# Altium PCB atWork_Encoder.PcbDoc
Units mm, origin at the board's own origin, x right, y up, seen from the top; angles counter-clockwise.
Board outline 132.46 x 79.88 mm, 2 copper layers (Top Layer, Bottom Layer); 74 components, 60 nets, 362 pads, 73 vias.
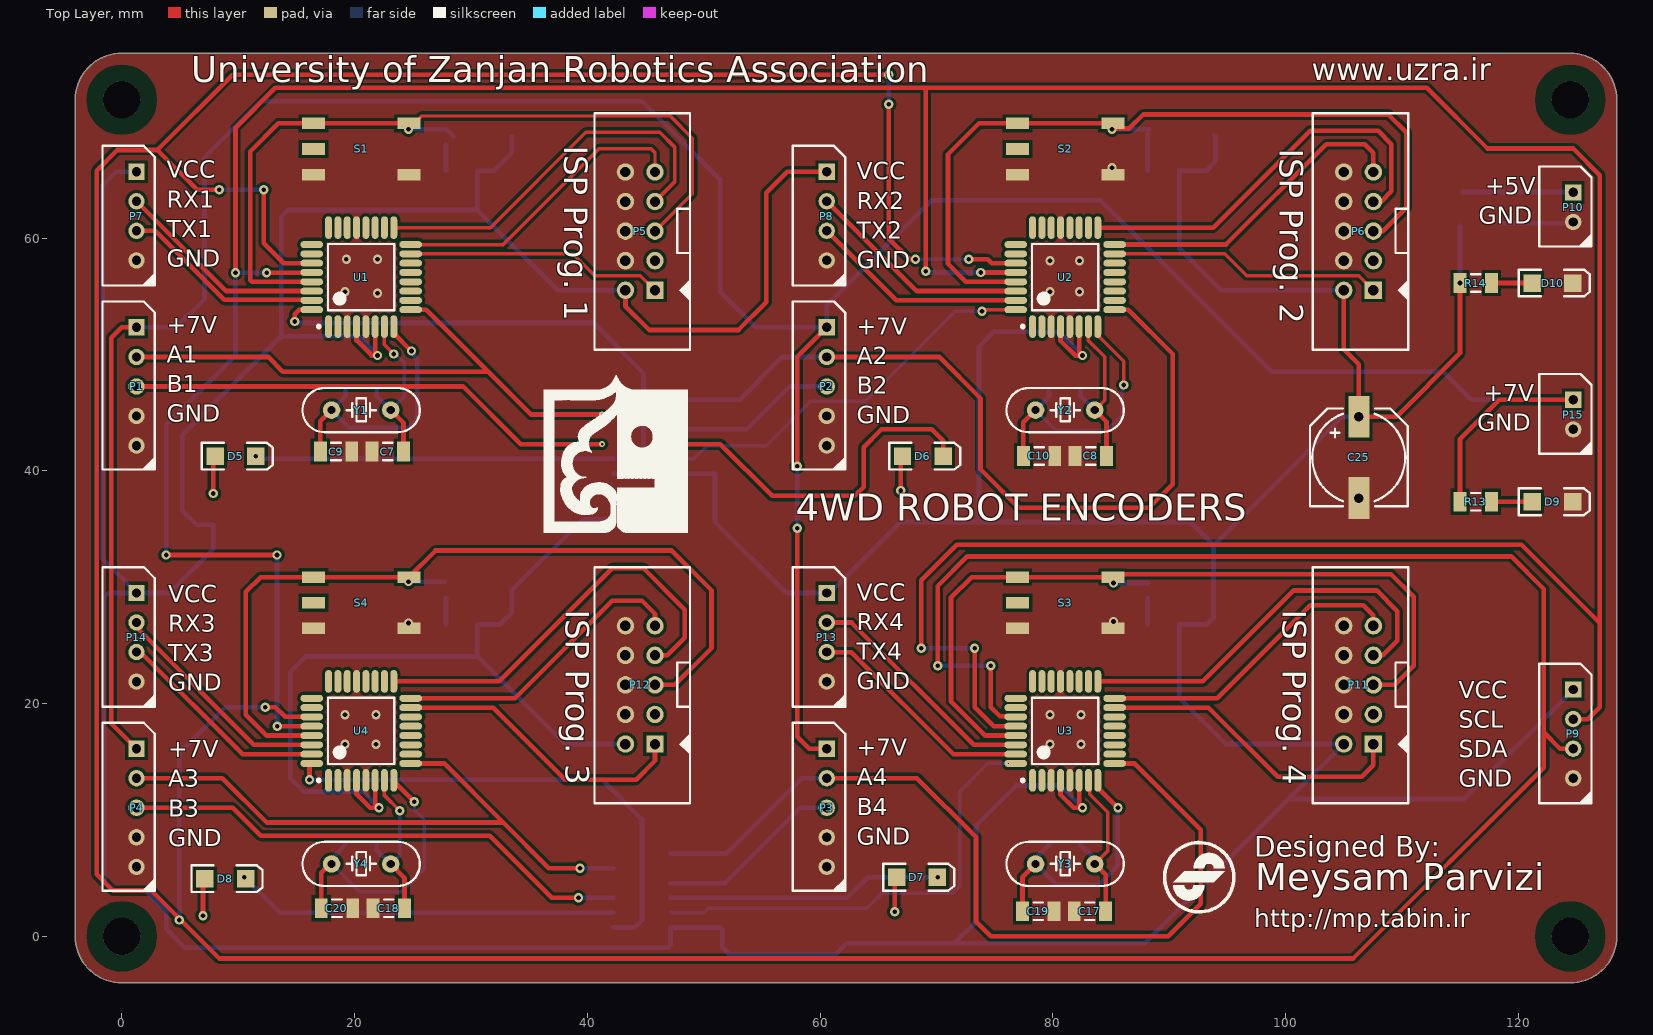
[diagram p0: Top Layer view]
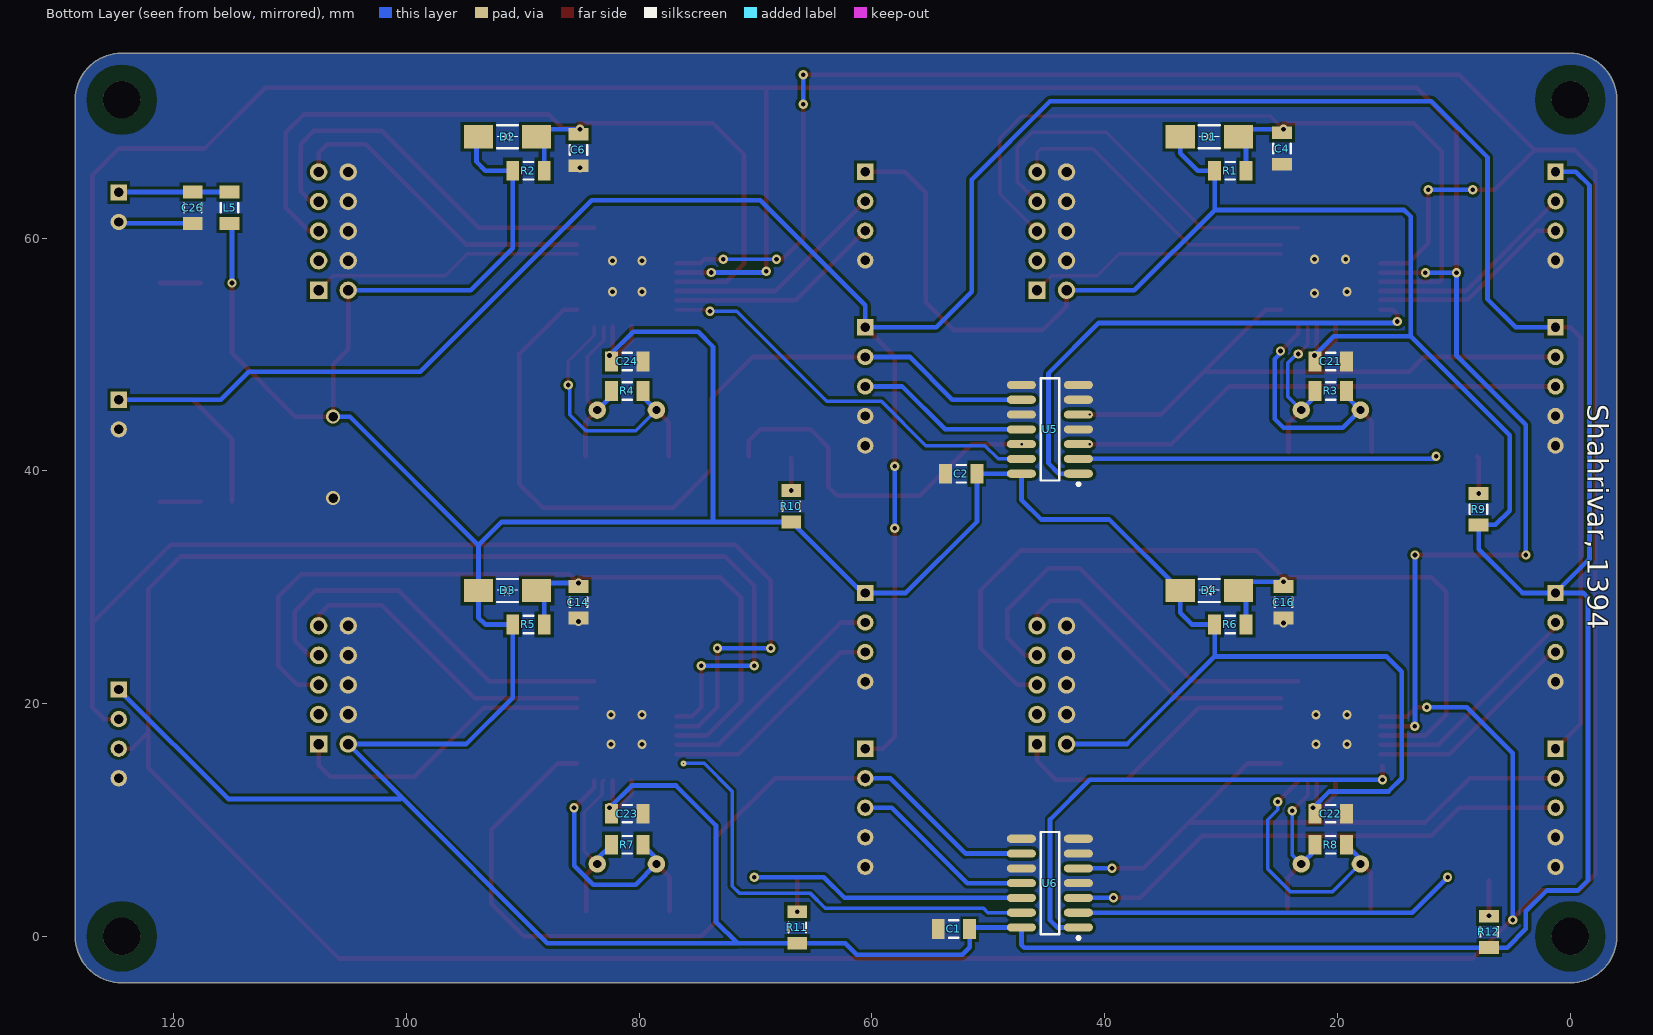
[diagram p1: Bottom Layer view, seen from below]

## Layer stack, top to bottom
Top Solder: solder mask 0.0102, Solder Resist, Dk 3.5
Top Layer: signal copper 0.0356
Dielectric 1: dielectric 0.32, FR-4, Dk 4.8
Bottom Layer: signal copper 0.0356
Bottom Solder: solder mask 0.0102, Solder Resist, Dk 3.5

## Board outline
-4,0 -4,71.882 cw(c0,71.882) 0,75.882 124.46,75.882 cw(c124.46,71.882) 128.46,71.882 128.46,0 cw(c124.46,0) 124.46,-4 0,-4 cw(c0,0)

## Design rules (kind name [scope] priority, off if disabled: settings)
Clearance [All] p1: gap=0.254
PolygonConnect [All] p1: connectstyle=Direct reliefconductorwidth=0.254 reliefentries=4 polygonreliefangle="90 Angle" airgapwidth=0.254
RoutingVias [All] p1: holewidth=0.711 width=1.27 viastyle="Through Hole" minholewidth=0.711 minwidth=1.27 maxholewidth=0.711 maxwidth=1.27
SolderMaskExpansion [All] p1: expansion=0.102
Width [All] p1: maxlimit=2 minlimit=0.254 preferedwidth=0.7 minimp=50.000000 maximp=50.000000 favimp=50.000000
30 further rules are at their usual default settings.

## Components (designator, comment, footprint, x,y, rotation, side; value= is the part's Value field where it differs from the comment)
C1 "Cap" C1206 52.959,0.635 r180 bottom
C2 "Cap" C1206 52.324,39.751 r180 bottom
C4 "Cap" C1206 24.765,67.691 r90 bottom
C6 "Cap" C1206 85.217,67.564 r90 bottom
C7 "Cap" C1206 22.86,41.656 r0 top
C8 "Cap" C1206 83.265,41.275 r0 top
C9 "Cap" C1206 18.415,41.656 r180 top
C10 "Cap" C1206 78.82,41.275 r180 top
C14 "Cap" C1206 85.217,28.702 r90 bottom
C16 "Cap" C1206 24.638,28.702 r90 bottom
C17 "Cap" C1206 83.185,2.159 r0 top (schematic designator C21)
C18 "Cap" C1206 22.94,2.413 r0 top (schematic designator C24)
C19 "Cap" C1206 78.74,2.159 r180 top
C20 "Cap" C1206 18.495,2.413 r180 top
C21 "Cap" C1206 20.574,49.403 r0 bottom
C22 "Cap" C1206 20.574,10.541 r0 bottom (schematic designator C26)
C23 "Cap" C1206 81.026,10.541 r0 bottom
C24 "Cap" C1206 81.026,49.403 r0 bottom
C25 "Cap Pol1" CAP-SMD1 106.299,41.148 r90 top
C26 "Cap" C1206 118.364,62.611 r90 bottom
D1 "Diode 1N4007" DIODE-SMD 31.012,68.707 r0 bottom
D2 "Diode 1N4007" DIODE-SMD 91.313,68.707 r0 bottom
D3 "Diode 1N4007" DIODE-SMD 91.313,29.718 r0 bottom
D4 "Diode 1N4007" DIODE-SMD 31.012,29.718 r0 bottom
D5 "LED2" 3.2X1.6X1.1 9.779,41.257 r0 top
D6 "LED2" 3.2X1.6X1.1 68.834,41.257 r0 top
D7 "LED2" 3.2X1.6X1.1 68.326,5.08 r0 top
D8 "LED2" 3.2X1.6X1.1 8.89,4.953 r0 top
D9 "LED2" 3.2X1.6X1.1 122.936,37.338 r0 top
D10 "LED2" 3.2X1.6X1.1 122.936,56.134 r0 top
L5 "Inductor" C1206 115.189,62.611 r270 bottom
P1 "Encoder2" XH5PIN 1.27,52.324 r90 top
P2 "Encoder1" XH5PIN 60.579,52.324 r90 top
P3 "Encoder2" XH5PIN 60.579,16.129 r90 top (schematic designator P6)
P4 "Encoder1" XH5PIN 1.27,16.129 r90 top (schematic designator P5)
P5 "Programmer2" BOX2X5 45.819,60.594 r90 top
P6 "Programmer1" BOX2X5 107.541,60.594 r90 top
P7 "UART2" XH4PIN 1.27,65.699 r90 top
P8 "UART1" XH4PIN 60.579,65.699 r90 top
P9 "I2C" XH4PIN 124.714,21.204 r90 top
P10 "Digital Power" XH2PIN 124.714,63.921 r90 top
P11 "Programmer4" BOX2X5 107.541,21.605 r90 top
P12 "Programmer3" BOX2X5 45.819,21.605 r90 top
P13 "UART4" XH4PIN 60.579,29.504 r90 top
P14 "UART3" XH4PIN 1.27,29.504 r90 top
P15 "Encoder Power" XH2PIN 124.714,46.101 r90 top
R1 "Res1" C1206 29.21,65.786 r180 bottom
R2 "Res1" C1206 89.511,65.786 r180 bottom
R3 "Res1" C1206 20.574,46.863 r0 bottom
R4 "Res1" C1206 81.026,46.863 r0 bottom
R5 "Res1" C1206 89.511,26.797 r180 bottom
R6 "Res1" C1206 29.21,26.797 r180 bottom
R7 "Res1" C1206 81.026,7.874 r0 bottom
R8 "Res1" C1206 20.574,7.874 r0 bottom
R9 "Res1" C1206 7.874,36.703 r90 bottom
R10 "Res1" C1206 66.929,36.957 r90 bottom
R11 "Res1" C1206 66.421,0.762 r90 bottom
R12 "Res1" C1206 6.985,0.381 r90 bottom
R13 "Res1" C1206 116.332,37.338 r180 top
R14 "Res1" C1206 116.332,56.134 r180 top
S1 "SW-PB" PUSH1 16.474,69.85 r0 top
S2 "SW-PB" PUSH1 76.962,69.85 r0 top
S3 "SW-PB" PUSH1 76.962,30.861 r0 top
S4 "SW-PB" PUSH1 16.474,30.861 r0 top
U1 "ATmega8A-AU" 32A_M 20.574,56.642 r90 top
U2 "ATmega8A-AU" 32A_M 81.062,56.642 r90 top
U3 "ATmega8A-AU" 32A_M 81.062,17.653 r90 top
U4 "ATmega8A-AU" 32A_M 20.574,17.653 r90 top
U5 "CD4013BCM" M14A_M 44.704,43.561 r0 bottom
U6 "CD4013BCM" M14A_M 44.704,4.572 r0 bottom
Y1 "XTAL" XTAL 20.574,45.212 r180 top
Y2 "XTAL" XTAL 81.062,45.212 r180 top
Y3 "XTAL" XTAL 81.062,6.223 r180 top
Y4 "XTAL" XTAL 20.574,6.223 r180 top

## Footprints (in the part's own frame and the unit in brackets; to place one, negate y for a bottom-side part, rotate by r counter-clockwise, add the part's x,y. Pads: shape width x height; smd on the part's side, far side on the other; paste and mask are expansions set on the pad)
3.2X1.6X1.1 [mm] "SMT LED; 2 Flat Leads"
  rect 1.5x1.5 smd: 1(-1.75,0) 2(1.75,0)
  silkscreen extent -2.9,-1.15 3.2,1.15
32A_M [mm] "Thin QFP, 32-Leads, Body 7x7mm, Pitch 0.8mm, IPC Low Density"
  oval 1.95x0.6 smd: 1(-4.25,2.8) 2(-4.25,2) 3(-4.25,1.2) 4(-4.25,0.4) 5(-4.25,-0.4) 6(-4.25,-1.2) 7(-4.25,-2) 8(-4.25,-2.8) 17(4.25,-2.8) 18(4.25,-2) 19(4.25,-1.2) 20(4.25,-0.4) 21(4.25,0.4) 22(4.25,1.2) 23(4.25,2) 24(4.25,2.8)
  oval 0.6x1.95 smd: 9(-2.8,-4.25) 10(-2,-4.25) 11(-1.2,-4.25) 12(-0.4,-4.25) 13(0.4,-4.25) 14(1.2,-4.25) 15(2,-4.25) 16(2.8,-4.25) 25(2.8,4.25) 26(2,4.25) 27(1.2,4.25) 28(0.4,4.25) 29(-0.4,4.25) 30(-1.2,4.25) 31(-2,4.25) 32(-2.8,4.25)
  silkscreen extent -4.37,-2.85 2.85,3.77, body extent -3.5,-3.5 3.5,3.5, height 1.2
BOX2X5 [mm] "Box Header; 5x2 Position"
  rect 1.5x1.5 hole 0.9: 1(-5.08,0)
  round 1.5 hole 0.9: 2(-5.08,2.54) 3(-2.54,0) 4(-2.54,2.54) 5(0,0) 6(0,2.54) 7(2.54,0) 8(2.54,2.54) 9(5.08,0) 10(5.08,2.54)
  silkscreen extent -10.18,-3 10.12,5.2, body extent -10.18,-3 10.12,5.2, height 9
C1206 [mm] "Chip Capacitor, Body 3.2x1.6mm, IPC High Density"
  rect 1.1x1.7 smd: 1(-1.35,0) 2(1.35,0)
  silkscreen extent -0.4,-0.75 0.4,0.75, body extent -1.7,-0.9 1.7,0.9, height 1.3
CAP-SMD1 [mm] "SMD Electrolyte Capacitor; 2 Leads; 100uF; 25V"
  rect 3.6x1.8 smd: 1(3.5,0) 2(-3.5,0)
  silkscreen extent -4.2,-4.2 4.2,4.2
DIODE-SMD [mm] "1N5822; SS34 Schottkey Diode"
  rect 2.5x2 smd: 1(-2.5,0) 2(2.5,0)
  silkscreen extent -0.9,-0.99 0.9,0.99
M14A_M [mm] "SOIC, 14-Leads, Body 8.6x3.9mm, Pitch 1.27mm, IPC Low Density"
  oval 2.5x0.7 smd: 1(-2.45,3.81) 2(-2.45,2.54) 3(-2.45,1.27) 4(-2.45,0) 5(-2.45,-1.27) 6(-2.45,-2.54) 7(-2.45,-3.81) 8(2.45,-3.81) 9(2.45,-2.54) 10(2.45,-1.27) 11(2.45,0) 12(2.45,1.27) 13(2.45,2.54) 14(2.45,3.81)
  silkscreen extent -2.57,-4.4 0.8,4.83, body extent -2,-4.38 2,4.38, height 1.75
PUSH1 [mm] "SMD Push Button; Arduino Uno Reset Button"
  rect 2x1 smd: 0(0,-2.2) 1(0,0) 1(8.2,0) 2(0,-4.4) 2(8.2,-4.4)
XH2PIN [mm] "XH 2 Pin Connector"
  rect 1.4x1.4 hole 0.8: 1(0,0)
  round 1.4 hole 0.8: 2(-2.54,0)
  silkscreen extent -4.65,-1.57 2.22,2.93
XH4PIN [mm] "XH 4 Pin Connector"
  rect 1.4x1.4 hole 0.8: 1(0,0)
  round 1.4 hole 0.8: 2(-2.54,0) 3(-5.08,0) 4(-7.62,0)
  silkscreen extent -9.78,-1.57 2.22,2.93
XH5PIN [mm] "XH 5 Pin Connector"
  rect 1.4x1.4 hole 0.8: 1(0,0)
  round 1.4 hole 0.8: 2(-2.54,0) 3(-5.08,0) 4(-7.62,0) 5(-10.16,0)
  silkscreen extent -12.22,-1.57 2.22,2.93
XTAL [mm] "Crystal, Thru Hole, 2 Leads"
  round 1.5 hole 0.7: 1(-2.54,0) 2(2.54,0)
  silkscreen extent -5.04,-1.91 5.04,1.91

## Part data
C1 C2 C4 C6 C7 C8 C9 C10 C14 C16 C17 C18 C19 C20 C21 C22 C23 C24 C26: "Capacitor"
C25: "Polarized Capacitor (Radial)"
D1 D2 D3 D4: "1 Amp General Purpose Rectifier"
D5 D6 D7 D8 D9 D10: "Typical RED, GREEN, YELLOW, AMBER GaAs LED"
P1 P2 P3 P4: library part "Header 5", "Header, 5-Pin"
P5 P6 P11 P12: library part "Box 5X2", "Box, 5-Pin, Dual row"
P7 P8 P9 P13 P14: library part "Header 4", "Header, 4-Pin"
P10 P15: library part "Header 2", "Header, 2-Pin"
R1 R2 R3 R4 R5 R6 R7 R8 R9 R10 R11 R12 R13 R14: "Resistor"
S1 S2 S3 S4: "Switch"
U1 U2 U3 U4: "8-bit AVR Microcontroller, 8KB Flash, 512 Bytes EEPROM, 1KB SRAM, 32-pin TQFP, Industrial Grade (-40°C to 85°C)"
U5 U6: "Dual D-Type Flip-Flop"
Y1 Y2 Y3 Y4: "Crystal Oscillator"

## Free pads (board coordinates)
  round 3.2 hole 3.2: 0(0,0) 0(0,71.882) 0(124.46,0) 0(124.46,71.882)

## Via types
v1: diameter 0.8, hole 0.4, Top Layer to Bottom Layer, 67 vias
v2: diameter 0.5, hole 0.2, Top Layer to Bottom Layer, 3 vias
v3: diameter 1.2, hole 0.8, Top Layer to Bottom Layer, 2 vias
v4: diameter 0.5, hole 0, Top Layer to Bottom Layer, 1 vias

## Nets (pads, with @x,y where several pads share a name; then routed paths per layer and width w, separated by ;. In a path a pad name is that pad's centre, name@x,y a point inside that pad or via, vN(x,y) a via of type N, cw(c..) or ccw(c..) an arc to the next point about the centre after c; other vN are vias at no path point)
5V: C26.2 L5.1 P10.1 | length 9.5
  Bottom Layer w0.4: L5.1 C26.2 P10.1@124.674,63.961
7V: P1.1 P2.1 P3.1 P4.1 P15.1 R13.2 | length 259.6
  Top Layer w0.4: P4.1 -0.889,18.288 -0.889,51.435 0,52.324 P1.1 ; v1@58.039,35.179 v1(58.039,35.052) 58.039,17.145 59.055,16.129 P3.1 ; v1(58.039,40.386) 58.039,49.784 P2.1 ; R13.2 114.982,42.719 118.364,46.101 P15.1
  Bottom Layer w0.4: P1.1 4.699,52.324 7.112,54.737 7.112,66.929 11.938,71.755 44.704,71.755 51.435,65.024 51.435,55.372 54.483,52.324 P2.1 60.579,54.229 69.596,63.246 84.074,63.246 98.806,48.514 113.538,48.514 115.951,46.101 P15.1 ; v1(58.039,35.052) v1(58.039,40.386)
A1: P2.2 U2.9 U5.9 | length 72.2
  Top Layer w0.4: P2.2 70.231,49.784 73.787,46.228 73.787,40.132 77.089,36.83 88.265,36.83 90.297,38.862 90.297,50.038 86.493,53.842 U2.9
  Bottom Layer w0.4: U5.9 53.086,46.101 56.769,49.784 P2.2
A2: P1.2 U1.9 U5.5 | length 50.9
  Top Layer w0.4: P1.2 12.573,49.784 13.843,48.514 31.496,48.514 ; U1.9 26.168,53.842 31.496,48.514 ; v2(41.275,44.831) 35.179,44.831 31.496,48.514
A3: P4.2 U4.9 U6.5 | length 54.2
  Top Layer w0.4: P4.2 8.636,13.589 12.446,9.779 32.766,9.779 ; U4.9 27.692,14.853 32.766,9.779 ; v1(39.37,5.842) 36.703,5.842 32.766,9.779
  Bottom Layer w0.4: v1(39.37,5.842) U6.5
A4: P3.2 U3.9 U6.9 | length 75.4
  Top Layer w0.4: P3.2 68.326,13.589 73.406,8.509 73.406,1.27 74.676,0 89.916,0 92.71,2.794 92.71,9.144 87.001,14.853 U3.9
  Bottom Layer w0.4: U6.9 51.943,7.112 58.42,13.589 P3.2
B1: P2.3 U5.11 | length 15
  Bottom Layer w0.4: U5.11 53.721,43.561 57.404,47.244 P2.3
B2: P1.3 U5.3 | length 42.1
  Top Layer w0.4: P1.3 29.337,47.244 34.29,42.291 v2(41.275,42.291)
B3: P4.3 U6.3 | length 44.2
  Top Layer w0.4: P4.3 9.525,11.049 11.938,8.636 31.623,8.636 36.957,3.302 v1(39.243,3.302)
  Bottom Layer w0.4: v1(39.243,3.302) U6.3
B4: P3.3 U6.11 | length 16.1
  Bottom Layer w0.4: U6.11 51.816,4.572 58.293,11.049 P3.3
DIR1: U2.32 U5.13 | length 35
  Top Layer w0.3: v1(73.914,53.721) 74.035,53.842 U2.32
  Bottom Layer w0.3: U5.13 49.149,41.021 50.292,42.164 55.372,42.164 59.182,45.974 63.881,45.974 71.628,53.721 v1(73.914,53.721)
DIR2: U1.32 U5.1 | length 44.8
  Top Layer w0.4: v1(14.859,52.832) 14.859,53.467 15.234,53.842 U1.32
  Bottom Layer w0.4: v1(14.859,52.832) 14.986,52.705 40.513,52.705 44.831,48.387 44.831,40.64 43.942,39.751 U5.1
DIR3: U4.32 U6.1 | length 42.5
  Top Layer w0.4: v1(16.129,13.462) U4.32@16.129,14.658
  Bottom Layer w0.4: v1(16.129,13.462) 41.275,13.462 44.704,10.033 44.704,1.397 44.069,0.762 U6.1
DIR4: U3.32 U6.13 | length 39.1
  Bottom Layer w0.3: U6.13 50.038,2.032 50.419,2.413 64.008,2.413 65.278,3.683 71.374,3.683 72.009,4.318 72.009,12.446 74.422,14.859 v4(76.2,14.859)
GND: C1.1 C2.1 C4.1 C6.1 C7.1 C8.1 C9.1 C10.1 C14.1 C16.1 C17.1 C18.1 C19.1 C20.1 C21.1 C22.1 C23.1 C24.1 C25.2 C26.1 D9.2 D10.2 P1.4 P1.5 P2.4 P2.5 P3.4 P3.5 P4.4 P4.5 P5.4 P5.6 P5.8 P5.10 P6.4 P6.6 P6.8 P6.10 P7.4 P8.4 P9.4 P10.2 P11.4 P11.6 P11.8 P11.10 P12.4 P12.6 P12.8 P12.10 P13.4 P14.4 P15.2 S1.2 S2.2 S3.2 S4.2 U1.3 U1.5 U1.21 U2.3 U2.5 U2.21 U3.3 U3.5 U3.21 U4.3 U4.5 U4.21 U5.4 U5.6 U5.7 U5.8 U5.10 U6.4 U6.6 U6.7 U6.8 U6.10 | length 6.2
  Bottom Layer w0.4: C26.1 P10.2@124.594,61.261
  other v1: 19.177,16.51 21.844,16.51 79.756,16.51 82.423,16.51 19.177,19.05 21.844,19.05 79.756,19.05 82.423,19.05 24.638,26.924 85.217,27.051 21.971,55.245 19.177,55.372 79.756,55.372 82.296,55.372 79.756,58.039 82.296,58.039 19.304,58.166 21.971,58.166 85.09,66.04
  other v3: 106.299,37.648
MISO1: P6.9 U2.16 | length 27.8
  Top Layer w0.4: U2.16 94.875,59.442 103.505,68.072 106.807,68.072 107.541,67.338 P6.9
MISO2: P5.9 U1.16 | length 26.2
  Top Layer w0.3: U1.16 32.772,59.442 41.021,67.691 45.466,67.691 45.819,67.338 P5.9
MISO3: P12.9 U4.16 | length 26
  Top Layer w0.4: U4.16 33.788,20.453 42.164,28.829 44.704,28.829 45.819,27.714 P12.9
MISO4: P11.9 U3.16 | length 26.8
  Top Layer w0.4: U3.16 94.113,20.453 102.108,28.448 106.68,28.448 107.541,27.587 P11.9
MOSI1: P6.1 U2.15 | length 23.5
  Top Layer w0.3: U2.15 94.774,58.642 96.647,56.769 106.285,56.769 P6.1
MOSI2: P5.1 U1.15 | length 22.3
  Top Layer w0.3: U1.15 38.767,58.642 40.64,56.769 44.563,56.769 P5.1
MOSI3: P12.1 U4.15 | length 25.7
  Top Layer w0.4: U4.15 31.909,19.653 38.1,13.462 44.196,13.462 45.819,15.085 P12.1
MOSI4: P11.1 U3.15 | length 26.9
  Top Layer w0.4: U3.15 93.377,19.653 99.314,13.716 106.553,13.716 107.541,14.704 P11.1
NetC7_2: C7.2 R3.2 U1.7 Y1.1 | length 14.8
  Top Layer w0.3: U1.7 22.574,50.832 v1(23.368,50.038)
  Top Layer w0.4: Y1.1 24.21,44.116 C7.2
  Bottom Layer w0.3: Y1.1 24.257,46.355 24.257,49.276 23.368,50.165 v1(23.368,50.038)
  Bottom Layer w0.4: R3.2 21.924,46.402 Y1.1
NetC8_2: C8.2 R4.2 U2.7 Y2.1 | length 14.6
  Top Layer w0.3: U2.7 83.062,51.63 83.062,51.177 84.455,49.784 84.455,46.065 Y2.1
  Top Layer w0.4: Y2.1 84.615,44.199 C8.2
  Bottom Layer w0.4: R4.2 82.376,46.438 Y2.1
NetC9_2: C9.2 R3.1 U1.8 Y1.2 | length 23.3
  Top Layer w0.4: C9.2 17.065,44.243 Y1.2 ; U1.8 23.374,51.81 v1(24.892,50.292)
  Bottom Layer w0.4: R3.1 19.224,46.402 Y1.2 19.558,43.688 24.638,43.688 25.4,44.45 25.4,49.604 24.765,50.239 24.818,50.292 v1(24.892,50.292)
NetC10_2: C10.2 R4.1 U2.8 Y2.2 | length 23.8
  Top Layer w0.3: U2.8 83.862,51.647 86.106,49.403 v1(86.106,47.371)
  Top Layer w0.4: C10.2 77.47,44.16 Y2.2
  Bottom Layer w0.3: Y2.2 80.3,43.434 84.582,43.434 85.979,44.831 v1@85.979,47.371
  Bottom Layer w0.4: Y2.2 79.676,46.366 R4.1
NetC17_2: C17.2 R7.2 U3.7 Y3.1 | length 14.9
  Top Layer w0.3: U3.7 83.158,13.307 83.158,12.219 84.709,10.668 84.709,7.33 Y3.1
  Top Layer w0.4: Y3.1 84.535,5.29 C17.2
  Bottom Layer w0.4: R7.2 83.602,6.648 Y3.1
NetC18_2: C18.2 R8.2 U4.7 Y4.1 | length 14.5
  Top Layer w0.3: U4.7 22.574,12.097 v1(23.876,10.795)
  Top Layer w0.4: Y4.1 24.29,5.047 C18.2
  Bottom Layer w0.3: Y4.1 23.876,6.985 v1(23.876,10.795)
  Bottom Layer w0.4: R8.2 21.924,7.413 Y4.1
NetC19_2: C19.2 R7.1 U3.8 Y3.2 | length 23.2
  Top Layer w0.4: C19.2 77.39,5.091 Y3.2 ; U3.8 83.862,12.785 v1(85.598,11.049)
  Bottom Layer w0.4: R7.1 78.522,6.72 Y3.2 80.3,4.445 83.947,4.445 85.581,6.079 85.581,11.032 v1(85.598,11.049)
NetC20_2: C20.2 R8.1 U4.8 Y4.2 | length 24.9
  Top Layer w0.4: C20.2 17.145,5.461 Y4.2@18.034,6.35 ; U4.8 23.374,13.329 v1(25.146,11.557)
  Bottom Layer w0.3: Y4.2 20.447,3.81 24.003,3.81 25.982,5.789 25.982,10.033 25.146,10.869 v1(25.146,11.557)
  Bottom Layer w0.4: Y4.2 18.034,6.684 R8.1
NetD5_1: D5.1 R9.2 | length 3.3
  Top Layer w0.4: v1(7.874,38.053) 7.874,41.102 D5.1
NetD5_2: D5.2 U5.2 | length 30.8
  Bottom Layer w0.4: v1(11.529,41.257) 11.765,41.021 U5.2
NetD6_1: D6.1 R10.2 | length 2.8
  Top Layer w0.4: v1(66.929,38.307) D6.1@66.929,41.102
NetD6_2: D6.2 U5.12 | length 31.4
  Top Layer w0.4: v2(47.117,42.291) 51.435,42.291 55.88,37.846 62.992,37.846 63.754,38.608 63.754,42.037 65.278,43.561 69.596,43.561 70.584,42.573 D6.2
NetD7_1: D7.1 R11.2 | length 3
  Top Layer w0.4: v1(66.421,2.112) 66.421,4.925 D7.1
NetD7_2: D7.2 U6.12 | length 23.7
  Bottom Layer w0.4: U6.12 62.357,3.302 64.135,5.08 v1(70.104,5.08)
NetD8_1: D8.1 R12.2 | length 3
  Top Layer w0.4: v1(6.985,1.778) D8.1@6.985,4.798
NetD8_2: D8.2 U6.2 | length 33
  Bottom Layer w0.4: v1(10.541,5.08) 13.589,2.032 U6.2
NetD9_1: D9.1 R13.1 | length 3.5
  Top Layer w0.4: R13.1 D9.1
NetD10_1: D10.1 R14.1 | length 3.5
  Top Layer w0.4: R14.1 D10.1
RESET1: C6.2 D2.1 P6.5 R2.2 S2.1 U2.29 | length 74.4
  Top Layer w0.4: U2.29 72.536,56.242 70.993,57.785 70.993,67.183 73.66,69.85 76.962,69.85 85.162,69.85 85.162,69.414 86.559,69.414 87.757,70.612 108.839,70.612 110.363,69.088 110.363,62.611 108.346,60.594 P6.5
  Bottom Layer w0.4: v1(85.09,69.342) D2.1@88.265,69.342 ; R2.2 D2.1@88.161,68.938
RESET2: C4.2 D1.1 P5.5 R1.2 S1.1 U1.29 | length 72.4
  Top Layer w0.3: v1(24.638,69.342) 25.781,70.485 47.117,70.485 49.022,68.58 49.022,63.797 P5.5
  Top Layer w0.4: U1.29 11.195,56.242 11.049,56.388 11.049,67.437 13.462,69.85 16.474,69.85 S1.1@24.674,69.85
  Bottom Layer w0.4: v1(24.638,69.342) 27.877,69.342 D1.1 ; R1.2 D1.1@27.86,68.055
RESET3: C16.2 D4.1 P12.5 R6.2 S4.1 U4.29 | length 76.3
  Top Layer w0.4: U4.29 12.465,17.253 10.668,19.05 10.668,29.591 11.938,30.861 16.474,30.861 24.674,30.861 26.96,33.147 47.244,33.147 50.673,29.718 50.673,24.765 47.513,21.605 P12.5
  Bottom Layer w0.4: v1(24.638,30.48) D4.1@27.75,30.48 ; R6.2 D4.1@27.86,29.066
RESET4: C14.2 D3.1 P11.5 R5.2 S3.1 U3.29 | length 72.5
  Top Layer w0.4: U3.29 74.187,17.253 71.247,20.193 71.247,29.083 73.025,30.861 76.962,30.861 S3.1@85.162,30.861 ; v1(85.217,30.353) 85.979,31.115 109.057,31.115 110.998,29.174 110.998,23.241 109.362,21.605 P11.5
  Bottom Layer w0.4: v1(85.217,30.353) D3.1@88.178,30.353 ; R5.2 D3.1@88.161,29.066
RX1: P8.2 U2.30 | length 19.4
  Top Layer w0.4: P8.2 68.296,55.442 U2.30
RX2: P7.2 U1.30 | length 18.3
  Top Layer w0.4: P7.2 8.987,55.442 U1.30
RX3: P14.2 U4.30 | length 19.7
  Top Layer w0.4: P14.2 1.27,26.543 11.36,16.453 U4.30
RX4: P13.2 U3.30 | length 20.6
  Top Layer w0.4: P13.2 62.698,26.964 73.209,16.453 U3.30
SCK1: P6.7 U2.17 | length 35.1
  Top Layer w0.4: U2.17 93.785,60.892 102.108,69.215 107.95,69.215 109.093,68.072 109.093,64.008 108.219,63.134 P6.7
SCK2: P5.7 U1.17 | length 33.4
  Top Layer w0.3: U1.17 31.682,60.892 39.878,69.088 46.228,69.088 47.498,67.818 47.498,64.813 P5.7
SCK3: P12.7 U4.17 | length 36.1
  Top Layer w0.4: U4.17 32.444,21.903 42.164,31.623 44.831,31.623 48.387,28.067 48.387,25.654 46.878,24.145 P12.7
SCK4: P11.7 U3.17 | length 34.8
  Top Layer w0.4: U3.17 92.896,21.903 100.711,29.718 107.823,29.718 109.601,27.94 109.601,25.4 108.346,24.145 P11.7
SCL: P9.2 U1.28 U2.28 U3.28 U4.28 | length 348.5
  Top Layer w0.4: v1(3.81,32.766) v1(13.335,32.766) ; v1(9.779,57.023) 9.779,69.469 13.208,72.898 69.088,72.898 ; v1(12.446,57.023) 16.305,57.023 U1.28 ; v1(13.354,18.053) U4.28 ; v1(68.707,24.765) 68.707,30.607 71.755,33.655 120.269,33.655 127,26.924 ; v1(69.088,57.15) 69.088,72.898 ; v1(73.279,24.765) 73.279,19.685 74.911,18.053 U3.28 ; v1(73.806,57.042) U2.28 ; P9.2 125.979,18.664 127,19.685 127,26.924 ; 69.088,72.898 112.141,72.898 117.348,67.691 124.714,67.691 127,65.405 127,26.924
  Bottom Layer w0.4: v1(3.81,32.766) 3.81,43.942 9.779,49.911 v1(9.779,57.023) v1(12.446,57.023) ; v1@13.335,18.072 v1(13.335,32.766) ; v1(68.707,24.765) v1(73.279,24.765) ; v1@69.196,57.042 v1(73.806,57.042)
SDA: P9.3 U1.27 U2.27 U3.27 U4.27 | length 429.8
  Top Layer w0.4: v1(8.382,64.135) 6.477,64.135 3.048,67.564 ; v1(12.192,64.135) 12.192,59.563 13.913,57.842 U1.27 ; v1(12.319,19.685) 13.208,19.685 14.04,18.853 U4.27 ; v1(65.913,71.501) 65.913,59.944 67.691,58.166 v1(68.199,58.166) ; v1(65.913,74.041) 9.525,74.041 3.048,67.564 ; v1(70.104,23.241) 70.104,30.099 72.644,32.639 119.38,32.639 122.174,29.845 122.174,17.526 ; v1(72.771,58.166) 74.422,58.166 74.746,57.842 U2.27 ; v1(74.676,23.241) 74.676,19.685 75.462,18.899 76.766,18.899 U3.27 ; P9.3 123.576,16.124 122.174,17.526 ; 3.048,67.564 -0.381,67.564 -2.159,65.786 -2.159,5.334 -0.762,3.937 2.54,3.937 8.382,-1.905 105.791,-1.905 122.174,14.478 122.174,17.526
  Bottom Layer w0.3: v1(68.199,58.166) v1(72.771,58.166)
  Bottom Layer w0.4: v1(4.953,1.397) 4.953,15.748 8.89,19.685 v1(12.319,19.685) ; v1(8.382,64.135) v1(12.192,64.135) ; v1(65.913,71.501) v1(65.913,74.041) ; v1(70.104,23.241) v1(74.676,23.241)
TX1: P8.3 U2.31 | length 18.7
  Top Layer w0.4: P8.3 66.556,54.642 U2.31
TX2: P7.3 U1.31 | length 17.5
  Top Layer w0.4: P7.3 2.885,60.619 8.816,54.688 16.278,54.688 U1.31
TX3: P14.3 U4.31 | length 18.7
  Top Layer w0.4: P14.3 1.611,24.424 10.382,15.653 U4.31
TX4: P13.3 U3.31 | length 19.9
  Top Layer w0.4: P13.3 62.698,24.424 71.469,15.653 U3.31
VCC: C1.2 C2.2 C21.2 C22.2 C23.2 C24.2 C25.1 D1.2 D2.2 D3.2 D4.2 L5.2 P5.2 P6.2 P7.1 P8.1 P9.1 P11.2 P12.2 P13.1 P14.1 R1.1 R2.1 R5.1 R6.1 R9.1 R10.1 R11.1 R12.1 R14.2 U1.4 U1.6 U2.4 U2.6 U3.4 U3.6 U4.4 U4.6 U5.14 U6.14 | length 654.6
  Top Layer w0.4: U4.4 20.174,12.211 21.336,11.049 v1(22.098,11.049) 21.774,11.373 U4.6 ; U1.4 20.174,51.2 21.463,49.911 v1(21.971,49.911) 21.774,50.108 U1.6 ; P5.2 43.279,54.13 45.311,52.098 52.987,52.098 55.372,54.483 55.372,63.881 57.19,65.699 P8.1 ; U3.4 80.662,12.175 81.788,11.049 v1(82.55,11.049) 82.262,11.337 U3.6 ; U2.4 80.662,51.164 81.915,49.911 v1(82.55,49.911) 82.262,50.199 U2.6 ; P6.2 105.001,50.447 106.299,49.149 v3(106.299,44.648) 109.545,44.648 114.982,50.085 v1(114.982,56.134)
  Bottom Layer w0.4: P7.1 -0.468,65.699 -1.651,64.516 -1.651,32.425 P14.1 ; v1(21.971,49.911) 20.32,51.562 13.716,51.562 ; v1(22.098,11.049) 20.701,12.446 15.621,12.446 14.478,13.589 14.478,22.733 15.795,24.05 30.56,24.05 ; D1.2 33.512,67.294 32.004,65.786 R1.1 30.56,62.404 ; P12.2 38.085,16.525 30.56,24.05 ; P5.2 37.45,55.514 30.56,62.404 ; C1.2@51.482,0.762 U6.14 47.154,-0.725 46.91,-0.969 R12.1 5.414,-0.969 3.81,0.635 3.81,2.159 2.032,3.937 -0.635,3.937 -1.524,4.826 -1.524,29.083 -1.103,29.504 P14.1 ; C1.2 51.609,-0.936 52.244,-1.571 61.294,-1.571 62.277,-0.588 R11.1 71.548,-0.588 ; 73.66,35.607 73.66,50.673 74.93,51.943 80.518,51.943 v1(82.55,49.911) ; v1(82.55,11.049) 80.645,12.954 76.835,12.954 73.406,9.525 73.406,1.27 71.548,-0.588 ; D2.2@93.853,68.834 93.98,68.707 93.98,66.548 93.218,65.786 R2.1 90.861,59.126 94.473,55.514 P6.2 ; v3(106.299,44.648) 104.846,44.648 93.813,33.615 ; v1(114.982,56.134) L5.2@114.982,61.054 ; P9.1 115.316,11.806 100.547,11.806 100.414,11.938 ; P14.1 4.104,29.504 7.874,33.274 R9.1 6.43,35.353 5.207,36.576 5.207,43.053 13.716,51.562 ; 13.716,51.562 13.716,61.849 14.271,62.404 30.56,62.404 ; 30.56,24.05 R6.1 32.512,26.797 33.512,27.797 D4.2 39.608,35.814 45.466,35.814 47.154,37.502 U5.14 C2.2 50.974,35.64 57.11,29.504 P13.1 60.826,29.504 R10.1 91.821,35.607 93.813,33.615 ; 71.548,-0.588 87.888,-0.588 100.414,11.938 ; 93.813,33.615 D3.2 93.813,27.392 93.218,26.797 R5.1 90.861,20.518 94.854,16.525 P11.2 100.414,11.938
pads on no net: P5.3 P6.3 P11.3 P12.3 S1.0 S2.0 S3.0 S4.0 U1.1 U1.2 U1.10 U1.11 U1.12 U1.13 U1.14 U1.18 U1.19 U1.20 U1.22 U1.23 U1.24 U1.25 U1.26 U2.1 U2.2 U2.10 U2.11 U2.12 U2.13 U2.14 U2.18 U2.19 U2.20 U2.22 U2.23 U2.24 U2.25 U2.26 U3.1 U3.2 U3.10 U3.11 U3.12 U3.13 U3.14 U3.18 U3.19 U3.20 U3.22 U3.23 U3.24 U3.25 U3.26 U4.1 U4.2 U4.10 U4.11 U4.12 U4.13 U4.14 U4.18 U4.19 U4.20 U4.22 U4.23 U4.24 U4.25 U4.26

## Polygon pours and split planes (outlines as drawn)
GND on Top Layer "Mechanical 1-No Net" (solid, pour order 2): -4,0 -4,71.882 cw(c0,71.882) 0,75.882 124.46,75.882 cw(c124.46,71.882) 128.46,71.882 128.46,0 cw(c124.46,0) 124.46,-4 0,-4 cw(c0,0)
GND on Bottom Layer "Mechanical 1-No Net" (solid, pour order 4): -4,0 -4,71.882 cw(c0,71.882) 0,75.882 124.46,75.882 cw(c124.46,71.882) 128.46,71.882 128.46,0 cw(c124.46,0) 124.46,-4 0,-4 cw(c0,0)

## Other copper
Top Layer:
  pour cut-out: 0,68.873 cw(c0,71.882) -3.009,71.882 cw(c0,71.882) 0,74.891 cw(c0,71.882) 3.009,71.882 cw(c0,71.882)
  pour cut-out: 3.009,0 cw(c0,0) 0,-3.009 cw(c0,0) -3.009,0 cw(c0,0) 0,3.009 cw(c0,0)
  pour cut-out: 124.46,3.009 cw(c124.46,0) 127.469,0 cw(c124.46,0) 124.46,-3.009 cw(c124.46,0) 121.451,0 cw(c124.46,0)
  pour cut-out: 121.451,71.882 cw(c124.46,71.882) 124.46,74.891 cw(c124.46,71.882) 127.469,71.882 cw(c124.46,71.882) 124.46,68.873 cw(c124.46,71.882)
Bottom Layer:
  pour cut-out: 0,68.873 cw(c0,71.882) -3.009,71.882 cw(c0,71.882) 0,74.891 cw(c0,71.882) 3.009,71.882 cw(c0,71.882)
  pour cut-out: 3.009,0 cw(c0,0) 0,-3.009 cw(c0,0) -3.009,0 cw(c0,0) 0,3.009 cw(c0,0)
  pour cut-out: 124.46,3.009 cw(c124.46,0) 127.469,0 cw(c124.46,0) 124.46,-3.009 cw(c124.46,0) 121.451,0 cw(c124.46,0)
  pour cut-out: 121.451,71.882 cw(c124.46,71.882) 124.46,74.891 cw(c124.46,71.882) 127.469,71.882 cw(c124.46,71.882) 124.46,68.873 cw(c124.46,71.882)

## Silkscreen, mask and mechanical layers (free items; w line width, h text height)
Top Overlay:
  drawing of 2362 lines, arcs and shapes, not listed
  text "www.uzra.ir" at 102.235,72.898 h3.2
  text "University of Zanjan Robotics Association" at 5.969,72.644 h3.8
  text "ISP Prog. 1" at 37.338,67.945 h3.5 r270
  text "ISP Prog. 2" at 98.806,67.691 h3.5 r270
  text "VCC" at 3.863,64.643 h2.5
  text "VCC" at 63.172,64.516 h2.5
  text "+5V" at 117.143,63.246 h2.5
  text "RX1" at 3.863,62.103 h2.5
  text "RX2" at 63.172,61.976 h2.5
  text "GND" at 116.586,60.706 h2.5
  text "TX1" at 3.863,59.563 h2.5
  text "TX2" at 63.172,59.436 h2.5
  text "GND" at 3.863,57.023 h2.5
  text "GND" at 63.172,56.896 h2.5
  text "+7V" at 3.863,51.308 h2.5
  text "+7V" at 63.172,51.181 h2.5
  text "A1" at 3.863,48.768 h2.5
  text "A2" at 63.172,48.641 h2.5
  text "B1" at 3.863,46.228 h2.5
  text "B2" at 63.172,46.101 h2.5
  text "+7V" at 117.016,45.466 h2.5
  text "GND" at 3.863,43.688 h2.5
  text "GND" at 63.172,43.561 h2.5
  text "GND" at 116.459,42.926 h2.5
  text "4WD ROBOT ENCODERS" at 57.912,34.925 h4
  text "VCC" at 63.172,28.321 h2.5
  text "VCC" at 3.99,28.194 h2.5
  text "ISP Prog. 3" at 37.465,28.067 h3.5 r270
  text "ISP Prog. 4" at 99.06,28.067 h3.5 r270
  text "RX4" at 63.172,25.781 h2.5
  text "RX3" at 3.99,25.654 h2.5
  text "TX4" at 63.172,23.241 h2.5
  text "TX3" at 3.99,23.114 h2.5
  text "GND" at 63.172,20.701 h2.5
  text "GND" at 3.99,20.574 h2.5
  text "VCC" at 114.861,19.939 h2.5
  text "SCL" at 114.861,17.399 h2.5
  text "+7V" at 63.172,14.986 h2.5
  text "+7V" at 3.99,14.859 h2.5
  text "SDA" at 114.861,14.859 h2.5
  text "A4" at 63.172,12.446 h2.5
  text "A3" at 3.99,12.319 h2.5
  text "GND" at 114.861,12.319 h2.5
  text "B4" at 63.172,9.906 h2.5
  text "B3" at 3.99,9.779 h2.5
  text "GND" at 63.172,7.366 h2.5
  text "GND" at 3.99,7.239 h2.5
  text "Designed By:" at 97.309,6.223 h3
  text "Meysam Parvizi" at 97.409,3.175 h4
  text "http://mp.tabin.ir" at 97.309,0.254 h2.7
Bottom Overlay:
  text "Shahrivar, 1394" at -0.889,45.72 h3 r90
Mechanical 1:
  the board outline again, w0.254